# Altium PCB MIXR - Power.PcbDoc (part 2 of 4)
Units mm, origin at the board's own origin, x right, y up, seen from the top; angles counter-clockwise.
Board outline 109.43 x 109.43 mm, 2 copper layers (Top Layer, Bottom Layer), stack 1.569 mm thick; 131 components, 82 nets, 420 pads, 247 vias.
Unrouted connection lines stored in the file: 102.
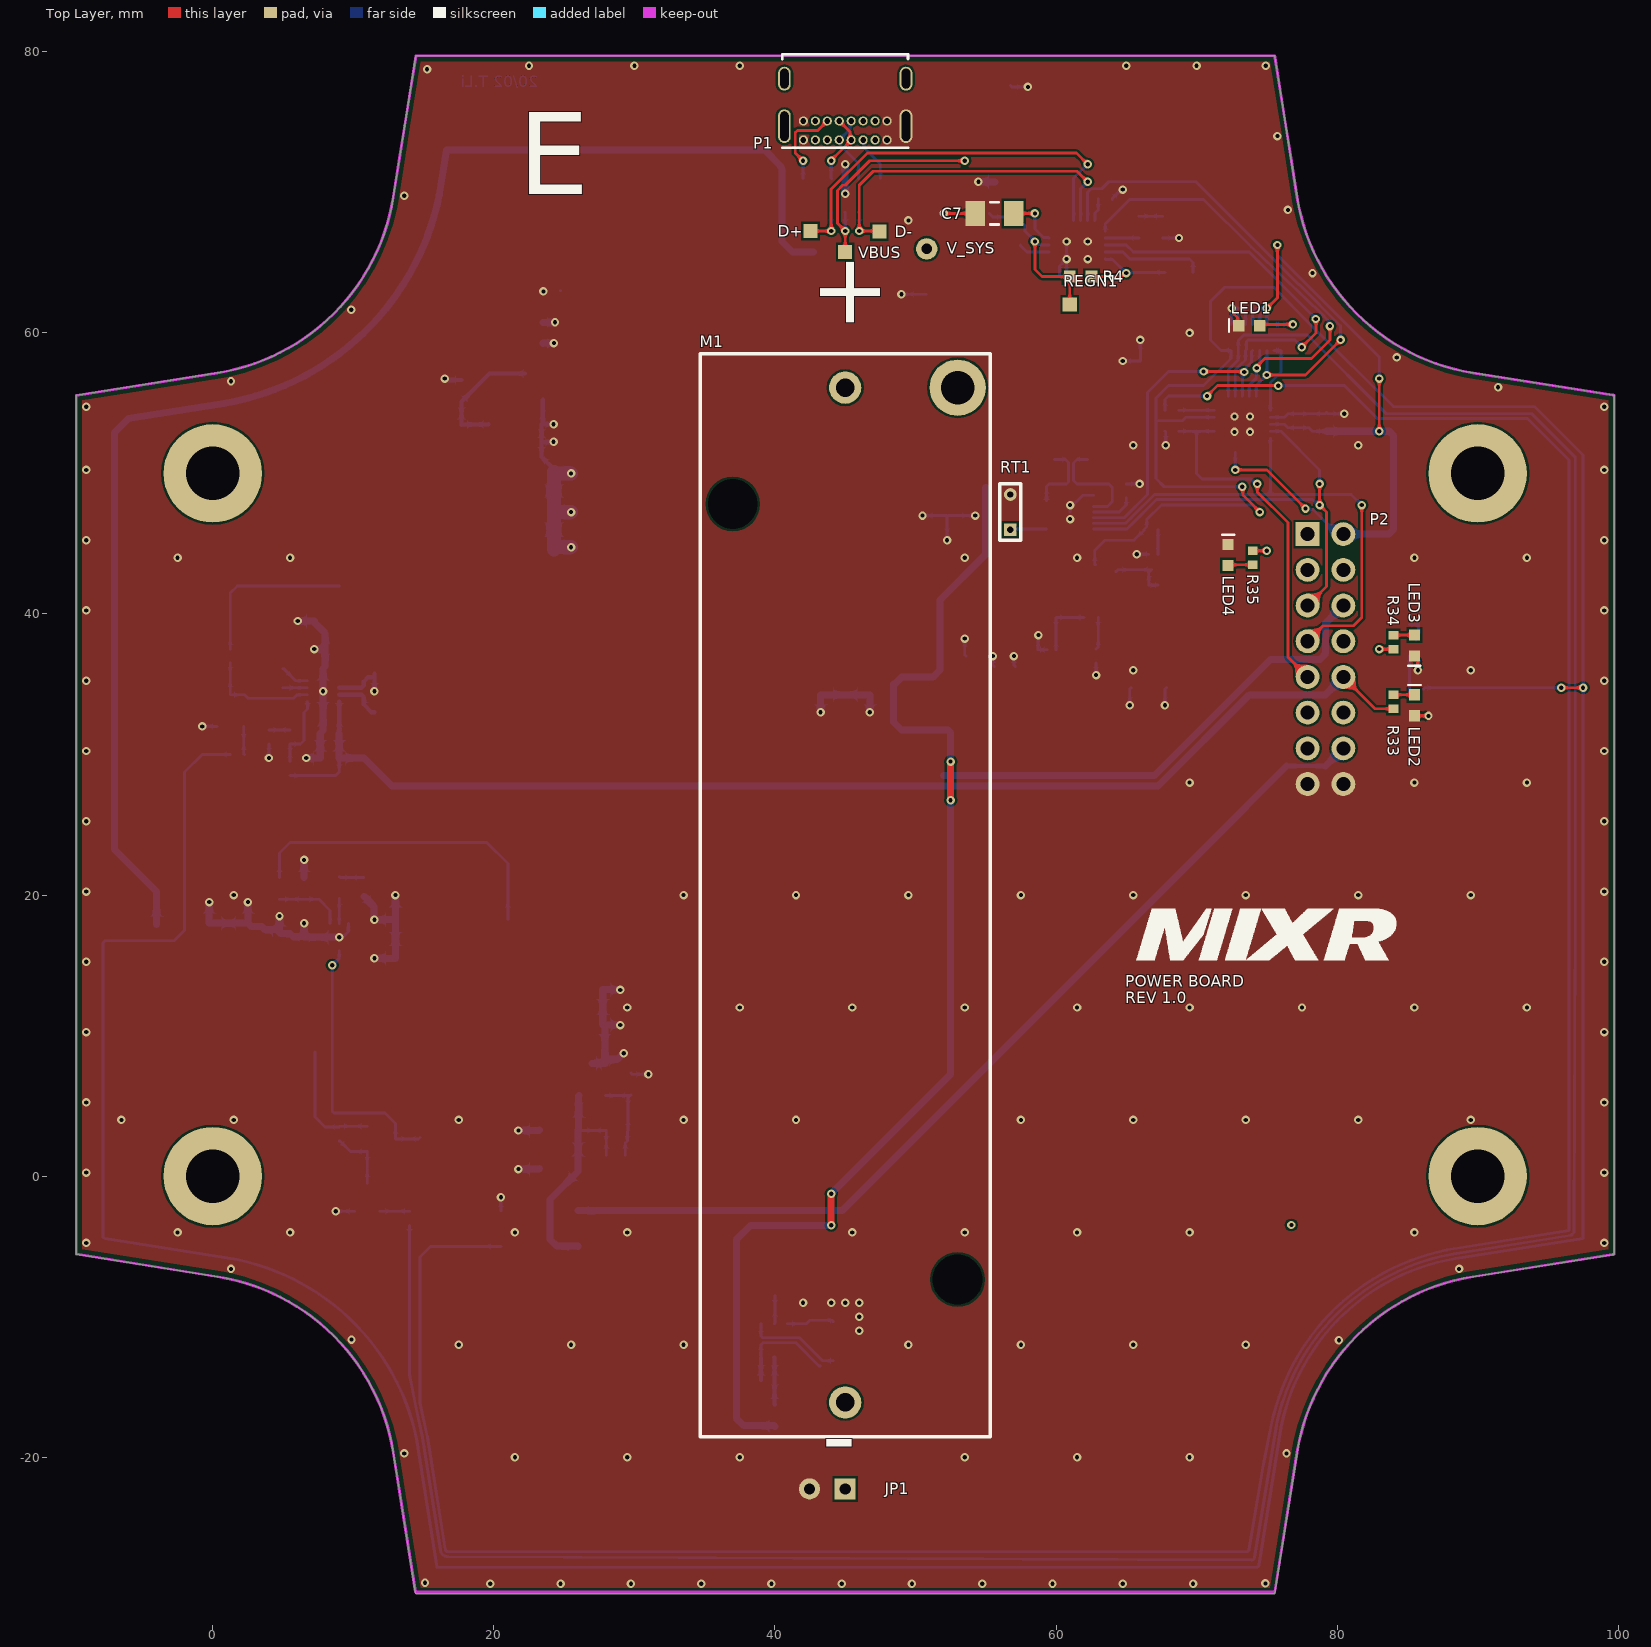
[diagram p0: Top Layer view]

## Part data (continued)
F3: "FUSE 5.0A 125VAC FAST 1206", Case Code (Imperial)=1206, Case Code (Metric)=3216, Current Rating=5A, DC Cold Resistance=19mR, Manufacturer="Bel TRP", Manufacturer Part Number=C1F5, Max Operating Temperature=125°C, Min Operating Temperature=-55°C, Supplier Part Number 1=507-1886-1-ND, Voltage Rating=125V, Voltage Rating (DC)=63V, Approvals=CE,cURus, Case/Package=1206, Category=Fuses, ComponentLink1Description=http://www.mouser.com/ds/2/643/C1F-594910.pdf?src-supplier=Mouser, ComponentLink1URL=http://www.mouser.com/ds/2/643/C1F-594910.pdf?src-supplier=Mouser, ComponentLink2Description=http://belfuse.com/pdfs/C1F.pdf?src-supplier=Avnet, ComponentLink2URL=http://belfuse.com/pdfs/C1F.pdf?src-supplier=Avnet, ComponentLink3Description=https://belfuse.com/resources/datasheets/circuitprotection/ds-cp-c1f-series.pdf?src-supplier=Digi-Key, ComponentLink3URL=https://belfuse.com/resources/datasheets/circuitprotection/ds-cp-c1f-series.pdf?src-supplier=Digi-Key, Contact Plating=Tin, Fuse Type="Board Mount (Cartridge Style Excluded)", Length=0.126inch, Mount="Surface Mount", Number of Pins=2, Packaging="Tape and Reel", Pricing 1="1=0.29000, 5=0.27800, 10=0.26500, 50=0.23660, 100=0.22030, 250=0.19584, 500=0.16320, 1000=0.15504 (USD)", RoHS=Yes, Stock 1=12696, Supplier 1=Digi-Key, Voltage Rating (AC)=125V, Width=0.062inch
JP1: library part "CONN 2POS JUMPER 0.1\"", "2 Positions Header Connector Through Hole Gold", Current Rating=2A, Insulation Color=Black, Manufacturer="Omron Electronics Inc-EMC Div", Manufacturer Part Number=XG8T-0231, Material Flammability Rating="UL94 V-0", Operating Temperature="-55°C ~ 105°C", Supplier Part Number 1=XG8T-0231-ND, Voltage Rating=300V, Applications=-, Category="Connectors, Interconnects", ComponentLink1Description=http://www.omron.com/ecb/products/pdf/en-xj8.pdf, ComponentLink1URL=http://www.omron.com/ecb/products/pdf/en-xj8.pdf, Connector Type=Header, Contact Finish - Mating=Gold, Contact Finish - Post=Tin, Contact Finish Thickness - Mating="5.9µin (0.15µm)", Contact Finish Thickness - Post=-, Contact Length - Mating="0.169\" (4.30mm)", Contact Length - Post="0.118\" (3.00mm)", Contact Material="Brass, Nickel", Contact Shape=Square, Contact Type="Male Pin", Fastening Type=-, Features=-, Ingress Protection=-, Insulation Height="0.098\" (2.50mm)", Insulation Material="Polybutylene Terephthalate (PBT), Glass Filled", Mated Stacking Heights=-, Mounting Type="Through Hole", Number of Positions=2, Number of Positions Loaded=All, Number of Rows=2, Overall Contact Length="0.386\" (9.80mm)", Packaging=Bulk, Part Status=Active, Pitch - Mating=-, Pricing 1="1=0.28, 10=0.265, 100=0.183, 500=0.15484, 1000=0.12668, 5000=0.11261, 10000=0.10205 (CAD)", RoHS="RoHS Compliant", Row Spacing - Mating="0.100\"", Shrouding=Unshrouded, Stock 1=9094, Style="Board to Board or Cable", Supplier 1=Digi-Key, Termination=Solder, Type=JUMPER
L1 L3: "WURTH ELEKTRONIK         74437334010             Surface Mount Power Inductor, WE-LHMI Series, 1 H, 5.3 A, 13.9 A, Shielded, 0.02 ohm", Case/Package=SMD/SMT, Current Rating=5.3A, DC Resistance (DCR)=20mR, Inductance=1uH, Inductance Tolerance=20%, Manufacturer="Wurth Electronics", Manufacturer Part Number=74437334010, Max Operating Temperature=125°C, Min Operating Temperature=-40°C, Saturation Current=13.9A, Self Resonant Frequency=65MHz, Supplier Part Number 1=732-6149-1-ND, Test Frequency=100kHz, Category="Fixed Inductors", ComponentLink1Description=http://www.farnell.com/datasheets/1880894.pdf?src-supplier=Farnell, ComponentLink1URL=http://www.farnell.com/datasheets/1880894.pdf?src-supplier=Farnell, ComponentLink2Description=http://www.farnell.com/datasheets/1880894.pdf?src-supplier=Element14, ComponentLink2URL=http://www.farnell.com/datasheets/1880894.pdf?src-supplier=Element14, Composition=Wirewound, Core Material=Ferrite, Height - Seated (Max)=0.079inch, Length=0.205inch, Mount="Surface Mount", Number of Pins=2, Packaging="Cut Tape", Pricing 1="1=2.39000, 50=2.21400, 100=2.01300, 250=1.83000, 500=1.66300 (USD)", REACH SVHC=Unknown, RMS Current (Irms)=5.3A, RoHS=Yes, Shielding=Shielded, Stock 1=2869, Supplier 1=Digi-Key, Tolerance=20%, Width=0.205inch
L2: "FIXED IND 22UH 1.7A 280MOHM SMD", Inductance=22uH, Manufacturer="Wurth Electronics", Manufacturer Part Number=74438356220, Supplier Part Number 1=732-11664-1-ND, ComponentLink1Description=https://katalog.we-online.de/pbs/datasheet/74438356220.pdf?src-supplier=Digi-Key, ComponentLink1URL=https://katalog.we-online.de/pbs/datasheet/74438356220.pdf?src-supplier=Digi-Key, Pricing 1="1=1.99000, 50=1.89700, 100=1.75600, 250=1.62600, 500=1.50600 (USD)", RoHS=No, Stock 1=1274, Supplier 1=Digi-Key
LED1: "Blue 470nm LED Indication - Discrete 2.8V 0603 (1608 Metric)", Color=Blue, Current - Test=5mA, Lens Color=Colorless, Manufacturer 1="Lite-On Inc.", Manufacturer Part Number 1=LTST-C193TBKT-5A, Millicandela Rating=15mcd, Package / Case="0603 (1608 Metric)", Supplier Device Package="Chip LED", Supplier Part Number 1=160-1827-1-ND, Voltage - Forward (Vf) (Typ)=2.8V, ComponentLink1Description=http://optoelectronics.liteon.com/upload/download/DS22-2004-060/P_100_LTST-C193TBKT-5A.pdf, ComponentLink1URL=http://optoelectronics.liteon.com/upload/download/DS22-2004-060/P_100_LTST-C193TBKT-5A.pdf, Height (Max)=0.45mm, Lens Style/Size="Rectangle with Flat Top, 1.15mm x 0.80mm", Lens Transparency=Clear, Mounting Type="Surface Mount", Packaging="Cut Tape (CT)", Part Status=Active, Size / Dimension="1.60mm L x 0.80mm W", Supplier 1=Digi-Key, Viewing Angle=130°, Wavelength - Dominant=470nm, Wavelength - Peak=468nm
LED2 LED3 LED4: "Green 572nm LED Indication - Discrete 2V 0603 (1608 Metric)", Color=Green, Current - Test=20mA, Lens Color=Colorless, Manufacturer="Wurth Electronics Inc.", Manufacturer Part Number=150060VS75000, Millicandela Rating=40mcd, Package / Case="0603 (1608 Metric)", Supplier Device Package=0603, Supplier Part Number 1=732-4980-1-ND, Voltage - Forward (Vf) (Typ)=2V, Category=Optoelectronics, ComponentLink1Description=http://katalog.we-online.de/led/datasheet/150060VS75000.pdf, ComponentLink1URL=http://katalog.we-online.de/led/datasheet/150060VS75000.pdf, Features=-, Height (Max)=0.80mm, Lens Style/Size="Rectangle with Flat Top, 1.10mm x 0.70mm", Lens Transparency=Clear, Mounting Type="Surface Mount", Packaging="Cut Tape (CT)", Part Status=Active, Pricing 1="1=0.21, 100=0.1617, 500=0.13964 (CAD)", RoHS="RoHS Compliant", Size / Dimension="1.60mm L x 0.80mm W", Stock 1=9408, Supplier 1=Digi-Key, Viewing Angle=140°, Wavelength - Dominant=570nm, Wavelength - Peak=572nm
M1: library part "BATTERY HOLDER 18650", "BATTERY HOLDER 18650 PC PIN", Manufacturer="Keystone Electronics", Manufacturer Part Number=1043P, Max Operating Temperature=145°C, Min Operating Temperature=-50°C, Package Quantity=50, Supplier Part Number 1=36-1043P-ND, Category=Uncategorized, ComponentLink1Description=https://datasheet.ciiva.com/41860/1043p-41860216.pdf?src-supplier=Digi-Key, ComponentLink1URL=https://datasheet.ciiva.com/41860/1043p-41860216.pdf?src-supplier=Digi-Key, Mount="Through Hole,PCB", Number of Cells=1, Packaging=Tray, Pricing 1="1=2.58000, 25=2.16760, 100=1.91000, 250=1.82000, 500=1.67000, 1000=1.52000, 2500=1.30900, 5000=1.19000 (USD)", RoHS=Yes, Stock 1=6353, Supplier 1=Digi-Key, Termination="PC Pin"
P1: "USB - C USB 2.0 Receptacle Connector 16 Position Through Hole, Right Angle", Manufacturer="Global Connector Technology", Manufacturer Part Number=USB4085-GF-A, Supplier Part Number 1=2073-USB4085-GF-ACT-ND, Pricing 1="1 = 1.440000, 10 = 1.307000, 25 = 1.227200, 50 = 1.174000, 100 = 1.120600, 250 = 1.013840 (USD)", RoHS=No, Stock 1=286, Supplier 1=Digi-Key
P2: "Conn Elevated Socket SKT 16 POS 2.54mm Solder ST Thru-Hole Tube", Contact Resistance=10mR, Housing Color=Black, Manufacturer=Samtec, Manufacturer Part Number=ESQ-108-12-T-D, Max Current Rating=6.9A, Max Operating Temperature=105°C, Max Voltage Rating (AC)=550V, Min Operating Temperature=-55°C, Supplier Part Number 1=SAM15568-ND, Category="Headers and Wire Housings", ComponentLink1Description=http://components.arrow.com/part/dataview/2753158S6123219N1004?src-supplier=Arrow, ComponentLink1URL=http://components.arrow.com/part/dataview/2753158S6123219N1004?src-supplier=Arrow, ComponentLink2Description=http://www.farnell.com/datasheets/1992053.pdf?src-supplier=Farnell, ComponentLink2URL=http://www.farnell.com/datasheets/1992053.pdf?src-supplier=Farnell, ComponentLink3Description=http://components.arrow.com/part/dataview/0323_01326666?src-supplier=Arrow+Europe, ComponentLink3URL=http://components.arrow.com/part/dataview/0323_01326666?src-supplier=Arrow+Europe, ComponentLink4Description=https://www.verical.com/server-webapp/html/getDatasheet?partID=176003&src-supplier=Verical, ComponentLink4URL=https://www.verical.com/server-webapp/html/getDatasheet?partID=176003&src-supplier=Verical, ComponentLink5Description=http://www.farnell.com/datasheets/1992053.pdf?src-supplier=Newark, ComponentLink5URL=http://www.farnell.com/datasheets/1992053.pdf?src-supplier=Newark, ComponentLink6Description=http://cloud.samtec.com/catalog_english/ESW_TH.PDF?src-supplier=Avnet, ComponentLink6URL=http://cloud.samtec.com/catalog_english/ESW_TH.PDF?src-supplier=Avnet, ComponentLink7Description=http://suddendocs.samtec.com/prints/esq-1xx-xx-x-x-xxx-xx-x-xx-mkt.pdf?src-supplier=Digi-Key, ComponentLink7URL=http://suddendocs.samtec.com/prints/esq-1xx-xx-x-x-xxx-xx-x-xx-mkt.pdf?src-supplier=Digi-Key, Contact Material=Bronze, Contact Plating=Tin, Depth=4.95mm, Gender=Receptacle, Housing Material=Polyester, Length=20.83mm, Number of Contacts=16, Number of Rows=2, Orientation=Vertical, Packaging=Rail/Tube, Pitch=2.54mm, Pricing 1="1=1.84000, 10=1.66800, 100=1.43010, 500=1.19176, 1000=1.02150, 5000=0.90573, 10000=0.88530 (USD)", Radiation Hardening=No, REACH SVHC="No SVHC", RoHS=Yes, Stock 1=40, Supplier 1=Digi-Key, Termination=Solder
Q1: "P-Channel 30V 3.8A (Ta) 1.08W (Ta) Surface Mount SOT-23", Current - Continuous Drain (Id) @ 25°C="3.8A (Ta)", Drive Voltage (Max Rds On,  Min Rds On)="4.5V, 10V", Manufacturer="Diodes Incorporated", Manufacturer Part Number=DMP3099L-7, Operating Temperature="-55°C ~ 150°C (TJ)", Package / Case="TO-236-3, SC-59, SOT-23-3", Power Dissipation (Max)="1.08W (Ta)", Supplier Device Package=SOT-23, Supplier Part Number 1=DMP3099L-7DICT-ND, Category="Discrete Semiconductor Products", ComponentLink1Description=https://www.diodes.com/assets/Datasheets/DMP3099L.pdf, ComponentLink1URL=https://www.diodes.com/assets/Datasheets/DMP3099L.pdf, FET Feature=-, FET Type=P-Channel, Mounting Type="Surface Mount", Packaging="Cut Tape (CT)", Part Status=Active, Pricing 1="1=0.59, 10=0.429, 100=0.2522, 500=0.14282, 1000=0.10949 (CAD)", Rds On (Max) @ Id, Vgs="65 mOhm @ 3.8A, 10V", RoHS="RoHS Compliant", Stock 1=108364, Supplier 1=Digi-Key, Technology="MOSFET (Metal Oxide)", Vgs (Max)=±20V, Vgs(th) (Max) @ Id="2.1V @ 250µA"
Q2: "N-Channel 30V 6.2A (Ta) 900mW (Ta) Surface Mount SOT-23", Case/Package=TO-236-3, Continuous Drain Current (ID)=6.2A, Drain to Source Voltage (Vdss)=30V, Input Capacitance=873pF, Manufacturer=Diodes, Manufacturer Part Number=DMN3023L-7, Max Operating Temperature=150°C, Max Power Dissipation=900mW, Min Operating Temperature=-55°C, Supplier Part Number 1=DMN3023L-7DICT-ND, ComponentLink1Description=https://www.diodes.com/assets/Datasheets/DMN3023L.pdf, ComponentLink1URL=https://www.diodes.com/assets/Datasheets/DMN3023L.pdf, ComponentLink2Description=http://www.mouser.com/ds/2/115/DMN3023L-959533.pdf, ComponentLink2URL=http://www.mouser.com/ds/2/115/DMN3023L-959533.pdf, Mount="Surface Mount", Packaging="Tape and Reel", Pricing 1="1=0.47, 10=0.368, 100=0.2529, 500=0.1734, 1000=0.1301 (USD)", Rds On Max=25mR, Stock 1=38246, Supplier 1=Digi-Key
Q3 Q4: "MOSFET 12V 29mOhm@4.5V 4.5A N-CH", Continuous Drain Current (ID)=4.5A, Drain to Source Breakdown Voltage=12V, Drain to Source Resistance=41mR, Gate to Source Voltage (Vgs)=8V, Input Capacitance=500pF, Manufacturer="Vishay Semiconductors", Manufacturer Part Number=SIA527DJ-T1-GE3, Max Operating Temperature=150°C, Max Power Dissipation=7.8W, Min Operating Temperature=-55°C, Package Quantity=3000, Resistance=0.00071R, Supplier Part Number 1=SIA527DJ-T1-GE3CT-ND, Category=MOSFETs, ComponentLink1Description=https://datasheet.ciiva.com/24094/sia527dj-267652-24094820.pdf?src-supplier=Mouser, ComponentLink1URL=https://datasheet.ciiva.com/24094/sia527dj-267652-24094820.pdf?src-supplier=Mouser, ComponentLink2Description=https://datasheet.ciiva.com/29589/sia527dj-29589668.pdf?src-supplier=Digi-Key, ComponentLink2URL=https://datasheet.ciiva.com/29589/sia527dj-29589668.pdf?src-supplier=Digi-Key, ComponentLink3Description=https://datasheet.ciiva.com/29589/sia527dj-29589669.pdf?src-supplier=Digi-Key, ComponentLink3URL=https://datasheet.ciiva.com/29589/sia527dj-29589669.pdf?src-supplier=Digi-Key, ComponentLink4Description=https://datasheet.ciiva.com/29589/sia527dj-29589670.pdf?src-supplier=Digi-Key, ComponentLink4URL=https://datasheet.ciiva.com/29589/sia527dj-29589670.pdf?src-supplier=Digi-Key, Drain to Source Voltage (Vdss)=12V, Element Configuration=Dual, Fall Time=10ns, FET Type="N and P-Channel", Mount="Surface Mount", Number of Channels=2, Packaging="Tape and Reel", Pricing 1="1=0.54000, 10=0.46400, 100=0.32140, 500=0.25090, 1000=0.20394 (USD)", Rds On Max=29mR, Rise Time=10ns, RoHS=Yes, Stock 1=14908, Supplier 1=Digi-Key, Turn-Off Delay Time=22ns, Turn-On Delay Time=10ns
Q5: "N-Channel 60V 310mA (Ta) 370mW (Ta) Surface Mount SOT-23", Case/Package=TO-236-3, Continuous Drain Current (ID)=1.6A, Drain to Source Breakdown Voltage=60V, Drain to Source Resistance=140mR, Gate to Source Voltage (Vgs)=20V, Input Capacitance=315pF, Manufacturer=Diodes, Manufacturer Part Number=DMN6140L-7, Max Operating Temperature=150°C, Max Power Dissipation=700mW, Min Operating Temperature=-55°C, Package Quantity=3000, Power Dissipation=540mW, Supplier Part Number 1=DMN65D8L-7DICT-ND, Threshold Voltage=3V, ComponentLink1Description=https://datasheet.ciiva.com/29747/dmn6140l-29747654.pdf, ComponentLink1URL=https://datasheet.ciiva.com/29747/dmn6140l-29747654.pdf, ComponentLink2Description=https://datasheet.ciiva.com/29747/dmn6140l-29747660.pdf, ComponentLink2URL=https://datasheet.ciiva.com/29747/dmn6140l-29747660.pdf, ComponentLink3Description=https://datasheet.ciiva.com/6371/dmn65d8l-6371124.pdf, ComponentLink3URL=https://datasheet.ciiva.com/6371/dmn65d8l-6371124.pdf, ComponentLink4Description=https://datasheet.ciiva.com/6371/dmn65d8l-6371126.pdf, ComponentLink4URL=https://datasheet.ciiva.com/6371/dmn65d8l-6371126.pdf, ComponentLink5Description=https://datasheet.ciiva.com/13058/dmn65d8l-219098-13058455.pdf, ComponentLink5URL=https://datasheet.ciiva.com/13058/dmn65d8l-219098-13058455.pdf, ComponentLink6Description=https://datasheet.ciiva.com/6371/dmn65d8l-6371128.pdf, ComponentLink6URL=https://datasheet.ciiva.com/6371/dmn65d8l-6371128.pdf, Drain to Source Voltage (Vdss)=60V, Element Configuration=Single, Fall Time=2.7ns, FET Type="1 N-Channel", Height=1.1mm, Lead Free="Lead Free", Length=3mm, Mount="Surface Mount", Number of Channels=1, Number of Elements=1, Number of Pins=3, Packaging="Tape and Reel", Rds On Max=140mR, REACH SVHC="No SVHC", Rise Time=3.6ns, Stock 1=0, Supplier 1=Digi-Key, Turn-Off Delay Time=16.3ns, Turn-On Delay Time=2.6ns, Weight=0.000282oz, Width=1.4mm
Q6: Case/Package=DFN, Continuous Drain Current (ID)=9.3A, Drain to Source Resistance=28mR, Drain to Source Voltage (Vdss)=20V, Gate to Source Voltage (Vgs)=12V, Input Capacitance=1.55nF, Manufacturer=Diodes, Manufacturer Part Number=DMN2014LHAB-7, Max Operating Temperature=150°C, Max Power Dissipation=800mW, Min Operating Temperature=-55°C, Package Quantity=3000, Supplier Part Number 1=DMN2014LHAB-7DICT-ND, Category=MOSFETs, ComponentLink1Description=https://datasheet.ciiva.com/29590/dmn2014lhab-29590005.pdf?src-supplier=Digi-Key, ComponentLink1URL=https://datasheet.ciiva.com/29590/dmn2014lhab-29590005.pdf?src-supplier=Digi-Key, ComponentLink2Description=https://datasheet.ciiva.com/29590/dmn2014lhab-29590007.pdf?src-supplier=Digi-Key, ComponentLink2URL=https://datasheet.ciiva.com/29590/dmn2014lhab-29590007.pdf?src-supplier=Digi-Key, ComponentLink3Description=https://datasheet.ciiva.com/29590/dmn2014lhab-29590006.pdf?src-supplier=Digi-Key, ComponentLink3URL=https://datasheet.ciiva.com/29590/dmn2014lhab-29590006.pdf?src-supplier=Digi-Key, Fall Time=12ns, FET Type="2 N-Channel", Height=0.6mm, Length=3.05mm, Mount="Surface Mount", Number of Pins=7, Packaging="Tape and Reel", Pricing 1="1=0.51000, 10=0.43800, 100=0.30340, 500=0.23688, 1000=0.19254 (USD)", Rds On Max=13mR, Rise Time=15.5ns, RoHS=Yes, Stock 1=3087, Supplier 1=Digi-Key, Turn-Off Delay Time=40.9ns, Turn-On Delay Time=6.9ns, Width=2.05mm
R1 R2: "5.1 kOhms ±1% 0.063W, 1/16W Chip Resistor 0402 (1005 Metric) Automotive AEC-Q200 Thick Film", Case Code (Imperial)=0402, Case Code (Metric)=1005, Manufacturer="Stackpole Electronics", Manufacturer Part Number=RMCF0402FT5K10, Max Operating Temperature=155°C, Max Power Dissipation=63mW, Min Operating Temperature=-55°C, Power Rating=62.5mW, Resistance=5K1, Supplier Part Number 1=RMCF0402FT5K10CT-ND, Temperature Coefficient=100ppm/°C, Tolerance=1%, Case/Package=0402, Category="Chip SMD Resistors", ComponentLink1Description=https://www.seielect.com/catalog/SEI-RMCF_RMCP.pdf?src-supplier=Avnet, ComponentLink1URL=https://www.seielect.com/catalog/SEI-RMCF_RMCP.pdf?src-supplier=Avnet, ComponentLink2Description=https://www.seielect.com/catalog/SEI-Packaging.pdf?src-supplier=Digi-Key, ComponentLink2URL=https://www.seielect.com/catalog/SEI-Packaging.pdf?src-supplier=Digi-Key, ComponentLink3Description=http://components.arrow.com/part/dataview/51396875S385758N1174?src-supplier=Arrow, ComponentLink3URL=http://components.arrow.com/part/dataview/51396875S385758N1174?src-supplier=Arrow, ComponentLink4Description=https://www.seielect.com/catalog/SEI-RMCF_RMCP.pdf?src-supplier=Avnet+Asia, ComponentLink4URL=https://www.seielect.com/catalog/SEI-RMCF_RMCP.pdf?src-supplier=Avnet+Asia, Composition="Thick Film", Contact Plating=Tin,Matte, Features="Automotive AEC-Q200", Height=0.016inch, Length=0.039inch, Mount="Surface Mount", Number of Terminations=2, Packaging="Tape and Reel", Pricing 1="1=0.10000, 10=0.01400, 100=0.00580, 1000=0.00262, 2500=0.00228, 5000=0.00188 (USD)", Radiation Hardening=No, RoHS=Yes, Stock 1=76800, Supplier 1=Digi-Key, Width=0.02inch
R3 R19 R23 R29 R30 R37 R40: "Surface Mount Thick Film Resistor, Rc Series, 10 Kohm, 62.5 Mw, - 1%, 50 V, 0402 [1005 Metric]", Case Code (Imperial)=0402, Case Code (Metric)=1005, Manufacturer=Yageo, Manufacturer Part Number=RC0402FR-0710KL, Max Operating Temperature=155°C, Min Operating Temperature=-55°C, Power Rating=62.5mW, Resistance=10K0, Supplier Part Number 1=311-10.0KLRCT-ND, Temperature Coefficient=100ppm/°C, Tolerance=1%, Voltage Rating=50V, Case/Package=0402, Category="Chip SMD Resistors", ComponentLink1Description=https://datasheet.ciiva.com/7660/38568-7660787.pdf?src-supplier=Element14, ComponentLink1URL=https://datasheet.ciiva.com/7660/38568-7660787.pdf?src-supplier=Element14, ComponentLink2Description=https://datasheet.ciiva.com/7983/1018594-7983486.pdf?src-supplier=Element14, ComponentLink2URL=https://datasheet.ciiva.com/7983/1018594-7983486.pdf?src-supplier=Element14, ComponentLink3Description=https://datasheet.ciiva.com/7849/1784430-7849813.pdf?src-supplier=Element14, ComponentLink3URL=https://datasheet.ciiva.com/7849/1784430-7849813.pdf?src-supplier=Element14, ComponentLink4Description=https://datasheet.ciiva.com/7849/1686128-7849814.pdf?src-supplier=Element14, ComponentLink4URL=https://datasheet.ciiva.com/7849/1686128-7849814.pdf?src-supplier=Element14, ComponentLink5Description=https://datasheet.ciiva.com/7849/1784430-7849815.pdf?src-supplier=Element14, ComponentLink5URL=https://datasheet.ciiva.com/7849/1784430-7849815.pdf?src-supplier=Element14, ComponentLink6Description=https://datasheet.ciiva.com/22747/1018594-22747512.pdf?src-supplier=Element14, ComponentLink6URL=https://datasheet.ciiva.com/22747/1018594-22747512.pdf?src-supplier=Element14, ComponentLink7Description=https://datasheet.ciiva.com/12667/pyu-rc0402-51-rohs-l-6-r-12667067.pdf?src-supplier=Mouser, ComponentLink7URL=https://datasheet.ciiva.com/12667/pyu-rc0402-51-rohs-l-6-r-12667067.pdf?src-supplier=Mouser, Composition="Thick Film", Depth=0.5mm, Height=0.32mm, Lead Free="Lead Free", Lead Pitch=0.2mm, Length=1mm, Military Standard=Not, Number of Pins=2, Number of Terminations=2, Packaging="Tape and Reel", Pricing 1="1=0.10000, 10=0.01600, 100=0.00640, 1000=0.00289, 2500=0.00251, 5000=0.00207 (USD)", REACH SVHC="No SVHC", RoHS=Yes, Stock 1=60761136, Supplier 1=Digi-Key, Termination=SMD/SMT, Voltage Rating (DC)=50V, Width=0.5mm, Working Voltage=50V
R4 R5 R11 R12: "RES SMD 10K OHM 1% 1/10W 0603", Manufacturer 1=Yageo, Manufacturer Part Number 1=RC0603FR-0710KL, Operating Temperature="-55°C ~ 155°C", Package / Case="0603 (1608 Metric)", Power=1/10W, Resistance=10k, Supplier Device Package=0603, Supplier Part Number 1=311-10.0KHRCT-ND, Temperature Coefficient=±100ppm/°C, Tolerance=±1%, ComponentLink1Description=http://www.yageo.com/documents/recent/PYu-RC_Group_51_RoHS_L_7.pdf, ComponentLink1URL=http://www.yageo.com/documents/recent/PYu-RC_Group_51_RoHS_L_7.pdf, Composition="Thick Film", Failure Rate=-, Height - Seated (Max)="0.022\" (0.55mm)", Packaging="Cut Tape (CT)", Part Status=Active, Size / Dimension="0.063\" L x 0.031\" W (1.60mm x 0.80mm)", Supplier 1=Digi-Key
R6: "220 Ohms ±1% 0.1W, 1/10W Chip Resistor 0603 (1608 Metric) Moisture Resistant Thick Film", Manufacturer=Yageo, Manufacturer Part Number=RC0603FR-07220RL, Operating Temperature="-55°C ~ 155°C", Package / Case="0603 (1608 Metric)", Power (Watts)=1/10W, Resistance=220, Supplier Device Package=0603, Supplier Part Number 1=311-220HRCT-ND, Temperature Coefficient=±100ppm/°C, Tolerance=±1%, Category=Resistors, ComponentLink1Description=http://www.yageo.com/documents/recent/PYu-RC_Group_51_RoHS_L_8.pdf, ComponentLink1URL=http://www.yageo.com/documents/recent/PYu-RC_Group_51_RoHS_L_8.pdf, Composition="Thick Film", Failure Rate=-, Features="Moisture Resistant", Height - Seated (Max)="0.022\" (0.55mm)", Packaging="Cut Tape (CT)", Part Status=Active, Pricing 1="1=0.15, 10=0.022, 100=0.0088, 1000=0.00392, 2500=0.0034 (CAD)", RoHS="RoHS Compliant", Size / Dimension="0.063\" L x 0.032\" W (1.60mm x 0.80mm)", Stock 1=1318812, Supplier 1=Digi-Key
R7: "330 Ohms ±1% 0.1W, 1/10W Chip Resistor 0603 (1608 Metric) Automotive AEC-Q200, Moisture Resistant Thick Film", Manufacturer="TE Connectivity", Manufacturer Part Number=CRGCQ0603F330R, Supplier Part Number 1=A129682CT-ND, ComponentLink1Description=http://www.te.com/commerce/DocumentDelivery/DDEController?Action=srchrtrv&DocNm=1773204-3&DocType=DS&DocLang=English&src-supplier=Digi-Key, ComponentLink1URL=http://www.te.com/commerce/DocumentDelivery/DDEController?Action=srchrtrv&DocNm=1773204-3&DocType=DS&DocLang=English&src-supplier=Digi-Key, ComponentLink2Description=https://www.te.com/commerce/DocumentDelivery/DDEController?Action=srchrtrv&DocNm=1773204-3&DocType=DS&DocLang=English&src-supplier=Digi-Key, ComponentLink2URL=https://www.te.com/commerce/DocumentDelivery/DDEController?Action=srchrtrv&DocNm=1773204-3&DocType=DS&DocLang=English&src-supplier=Digi-Key, Pricing 1="1 = 0.10000, 10 = 0.03300, 100 = 0.01320, 1000 = 0.00595, 2500 = 0.00516 (USD)", RoHS=No, Stock 1=87700, Supplier 1=Digi-Key
R8: "RES SMD 40.2 OHM 0.5% 1/10W 0603", Manufacturer 1=Yageo, Manufacturer Part Number 1=RT0603DRE0740R2L, Operating Temperature="-55°C ~ 155°C", Package / Case="0603 (1608 Metric)", Power=1/10W, Resistance=40.2, Supplier Device Package=0603, Supplier Part Number 1=311-2576-1-ND, Temperature Coefficient=±50ppm/°C, Tolerance=±0.5%, ComponentLink1Description=http://www.yageo.com/documents/recent/PYu-RT_1-to-0.01_RoHS_L_7.pdf, ComponentLink1URL=http://www.yageo.com/documents/recent/PYu-RT_1-to-0.01_RoHS_L_7.pdf, Composition="Thin Film", Failure Rate=-, Height - Seated (Max)="0.022\" (0.55mm)", Packaging="Cut Tape (CT)", Part Status=Active, Size / Dimension="0.063\" L x 0.031\" W (1.60mm x 0.80mm)", Supplier 1=Digi-Key
R9: "390 kOhms ±0.5% 0.1W, 1/10W Chip Resistor 0603 (1608 Metric) Thin Film", Case Code (Imperial)=0603, Case Code (Metric)=1608, Manufacturer=Yageo, Manufacturer Part Number=RT0603DRE07390KL, Max Operating Temperature=155°C, Max Power Dissipation=100mW, Min Operating Temperature=-55°C, Resistance=390k, Supplier Part Number 1=311-2555-1-ND, Temperature Coefficient=50ppm/°C, Tolerance=0.5%, Case/Package=0603, ComponentLink1Description=http://www.yageo.com/documents/recent/PYu-RT_1-to-0.01_RoHS_L_9.pdf?src-supplier=Digi-Key, ComponentLink1URL=http://www.yageo.com/documents/recent/PYu-RT_1-to-0.01_RoHS_L_9.pdf?src-supplier=Digi-Key, Composition="Thin Film", Features="Moisture Resistant", Height=0.022inch, Length=0.063inch, Number of Terminations=2, Packaging="Tape and Reel", Pricing 1="1 = 0.13000, 10 = 0.11900, 100 = 0.04580, 1000 = 0.02014, 2500 = 0.01740 (USD)", RoHS=Yes, Stock 1=4470, Supplier 1=Digi-Key, Width=0.031inch
R10 R14 R31 R38: "RES SMD 162K OHM 1% 1/16W 0402", Case Code (Imperial)=0402, Case Code (Metric)=1005, Manufacturer=Yageo, Manufacturer Part Number=RC0402FR-07162KL, Max Operating Temperature=155°C, Max Power Dissipation=63mW, Min Operating Temperature=-55°C, Package Quantity=10000, Power Rating=62.5mW, Resistance=162K, Supplier Part Number 1=YAG2370CT-ND, Temperature Coefficient=100ppm/°C, Tolerance=1%, Voltage Rating=50V, Case/Package=0402, Category="Chip SMD Resistors", ComponentLink1Description=https://datasheet.ciiva.com/2452/pyu-r-int-thick-7-2452605.pdf?src-supplier=Digi-Key, ComponentLink1URL=https://datasheet.ciiva.com/2452/pyu-r-int-thick-7-2452605.pdf?src-supplier=Digi-Key, ComponentLink2Description=https://datasheet.ciiva.com/16869/pyu-rc0402-51-rohs-l-6-16869191.pdf?src-supplier=Avnet+Europe, ComponentLink2URL=https://datasheet.ciiva.com/16869/pyu-rc0402-51-rohs-l-6-16869191.pdf?src-supplier=Avnet+Europe, Composition="Thick Film", Contact Plating=Tin,Matte, Depth=0.5mm, Features="Moisture Resistant", Height=0.016inch, Lead Free="Lead Free", Length=1mm, Military Standard=Not, Number of Terminations=2, Packaging="Tape and Reel", Pricing 1="1=0.10000, 10=0.01600, 100=0.00640, 1000=0.00289, 2500=0.00251, 5000=0.00207 (USD)", RoHS=Yes, Stock 1=987661, Supplier 1=Digi-Key, Termination=SMD/SMT, Voltage Rating (DC)=50V, Width=0.02inch
R13 R26 R32 R39: "RES SMD 22.1 OHM 1% 1/16W 0402", Case Code (Imperial)=0402, Case Code (Metric)=1005, Manufacturer=Yageo, Manufacturer Part Number=RC0402FR-0722R1L, Max Operating Temperature=155°C, Max Power Dissipation=63mW, Min Operating Temperature=-55°C, Package Quantity=1, Power Rating=62.5mW, Resistance=22R1, Supplier Part Number 1=311-22.1LRCT-ND, Temperature Coefficient=100ppm/°C, Tolerance=1%, Voltage Rating=50V, Case/Package=0402, Category="Chip SMD Resistors", ComponentLink1Description=https://datasheet.ciiva.com/11808/0900766b80c66297-11808453.pdf?src-supplier=RSComponents, ComponentLink1URL=https://datasheet.ciiva.com/11808/0900766b80c66297-11808453.pdf?src-supplier=RSComponents, ComponentLink2Description=https://datasheet.ciiva.com/16740/pyu-rc0402-51-rohs-l-6-r-16740855.pdf?src-supplier=Future+Electronics, ComponentLink2URL=https://datasheet.ciiva.com/16740/pyu-rc0402-51-rohs-l-6-r-16740855.pdf?src-supplier=Future+Electronics, ComponentLink3Description=https://datasheet.ciiva.com/2518/pyu-r-int-thick-7-2518970.pdf?src-supplier=Digi-Key, ComponentLink3URL=https://datasheet.ciiva.com/2518/pyu-r-int-thick-7-2518970.pdf?src-supplier=Digi-Key, ComponentLink4Description=https://datasheet.ciiva.com/2518/pyu-r-int-thick-7-2518971.pdf?src-supplier=Digi-Key, ComponentLink4URL=https://datasheet.ciiva.com/2518/pyu-r-int-thick-7-2518971.pdf?src-supplier=Digi-Key, ComponentLink5Description=https://datasheet.ciiva.com/2518/pyu-r-int-thick-7-2518972.pdf?src-supplier=Digi-Key, ComponentLink5URL=https://datasheet.ciiva.com/2518/pyu-r-int-thick-7-2518972.pdf?src-supplier=Digi-Key, Composition="Thick Film", Depth=0.5mm, Features="Moisture Resistant", Height=0.016inch, Lead Free="Lead Free", Length=1mm, Military Standard=Not, Number of Terminations=2, Packaging="Tape and Reel", Pricing 1="1=0.10000, 10=0.01600, 100=0.00640, 1000=0.00289, 2500=0.00251, 5000=0.00207 (USD)", REACH SVHC="No SVHC", RoHS=Yes, Stock 1=5073010, Supplier 1=Digi-Key, Termination=SMD/SMT, Voltage Rating (DC)=50V, Width=0.02inch, Working Voltage=50V
R15: "RES SMD 1M OHM 0.1% 1/10W 0603", Case/Package=0603, Manufacturer=Yageo, Manufacturer Part Number=RT0603BRD071ML, Max Operating Temperature=155°C, Max Power Dissipation=100mW, Min Operating Temperature=-55°C, Resistance=1M, Supplier Part Number 1=YAG4498CT-ND, Temperature Coefficient=25ppm/°C, Tolerance=0.1%, Category="Chip SMD Resistors", ComponentLink1Description=http://www.yageo.com/documents/recent/PYu-RT_1-to-0.01_RoHS_L_9.pdf?src-supplier=Digi-Key, ComponentLink1URL=http://www.yageo.com/documents/recent/PYu-RT_1-to-0.01_RoHS_L_9.pdf?src-supplier=Digi-Key, Composition="Thin Film", Features="Moisture Resistant", Height=0.022inch, Length=0.063inch, Number of Terminations=2, Packaging="Tape and Reel", Pricing 1="1=0.35000, 10=0.29600, 100=0.11550, 1000=0.04837, 2500=0.04434 (USD)", RoHS=Yes, Stock 1=26042, Supplier 1=Digi-Key, Width=0.031inch
R16: "RES SMD 26.7K OHM 0.1% 1/5W 0603", Case Code (Imperial)=0603, Case Code (Metric)=1608, Manufacturer=Panasonic, Manufacturer Part Number=ERJ-PB3B2672V, Max Operating Temperature=155°C, Max Power Dissipation=200mW, Min Operating Temperature=-55°C, Resistance=26K7, Supplier Part Number 1=P20132CT-ND, Temperature Coefficient=50ppm/°C, Tolerance=0.1%, Case/Package=0603, Category="Chip SMD Resistors", ComponentLink1Description=https://industrial.panasonic.com/sa/system/files/data/download/catalog/id_fixed-resistors_e_2.pdf?src-supplier=Digi-Key, ComponentLink1URL=https://industrial.panasonic.com/sa/system/files/data/download/catalog/id_fixed-resistors_e_2.pdf?src-supplier=Digi-Key, Composition="Thick Film", Features="Automotive AEC-Q200", Height - Seated (Max)=0.022inch, Length=0.063inch, Number of Terminations=2, Packaging="Tape and Reel", Pricing 1="1=0.25000, 10=0.21100, 25=0.15320, 50=0.11100, 100=0.08230, 250=0.06316, 500=0.04976, 1000=0.03445 (USD)", RoHS=Yes, Stock 1=4400, Supplier 1=Digi-Key, Width=0.032inch
R17: "RES SMD 1K OHM 0.1% 1/16W 0402", Case Code (Imperial)=0402, Case Code (Metric)=1005, Manufacturer=Yageo, Manufacturer Part Number=RT0402BRE071KL, Max Operating Temperature=125°C, Max Power Dissipation=63mW, Min Operating Temperature=-55°C, Package Quantity=10000, Power Rating=62.5mW, Resistance=1K, Supplier Part Number 1=YAG2306CT-ND, Temperature Coefficient=50ppm/°C, Tolerance=0.1%, Voltage Rating=50V, Case/Package=0402, Category="Chip SMD Resistors", ComponentLink1Description=https://datasheet.ciiva.com/2582/pyu-rt-1-to-0-05-rohs-l-5-2582672.pdf?src-supplier=Digi-Key, ComponentLink1URL=https://datasheet.ciiva.com/2582/pyu-rt-1-to-0-05-rohs-l-5-2582672.pdf?src-supplier=Digi-Key, ComponentLink2Description=https://datasheet.ciiva.com/12796/pyu-rt-1-to-0-05-rohs-l-4-12796476.pdf?src-supplier=Mouser, ComponentLink2URL=https://datasheet.ciiva.com/12796/pyu-rt-1-to-0-05-rohs-l-4-12796476.pdf?src-supplier=Mouser, Composition="Thin Film", Depth=0.5mm, Features="Moisture Resistant", Height=0.014inch, Lead Free="Lead Free", Length=1mm, Military Standard=Not, Number of Terminations=2, Packaging="Tape and Reel", Pricing 1="1=0.41000, 10=0.29200, 100=0.11690, 1000=0.05758, 2500=0.05335, 5000=0.04827 (USD)", RoHS=Yes, Stock 1=46127, Supplier 1=Digi-Key, Termination=SMD/SMT, Voltage Rating (DC)=50V, Weight=2.3E-05oz, Width=0.02inch
R18: library part "RES ARRAY 10K OHM 5% 8RES EXB-2HV103JV", "RES ARRAY SMD 10K 5% 62.5mW 1506", Manufacturer="Panasonic Electronic Components", Manufacturer Part Number=EXB-2HV103JV, Operating Temperature="-55°C ~ 125°C", Package / Case="1506, Convex, Long Side Terminals", Power Per Element=62.5mW, Resistance (Ohms)=10k, Supplier Device Package=1506, Supplier Part Number 1=Y1103CT-ND, Temperature Coefficient=±200ppm/°C, Tolerance=±5%, Applications="Automotive AEC-Q200", C="Copyright (C) 2015 Accelerated Designs. All rights reserved", Category=Resistors, Circuit Type=Isolated, ComponentLink1Description=https://industrial.panasonic.com/cdbs/www-data/pdf/AOC0000/AOC0000C14.pdf, ComponentLink1URL=https://industrial.panasonic.com/cdbs/www-data/pdf/AOC0000/AOC0000C14.pdf, Copyright="Copyright (C) 2015 Accelerated Designs. All rights reserved", Height - Seated (Max)="0.022\" (0.55mm)", Manufacturer_Part_Number=EXB-2HV103JV, Mounting Type="Surface Mount", Packaging="Cut Tape (CT)", Part Status=Active, Pricing 1="1=0.43, 10=0.373, 25=0.2712, 50=0.1964, 100=0.1456, 250=0.11176, 500=0.08806, 1000=0.06096 (CAD)", RoHS="RoHS Compliant", Size / Dimension="0.150\" L x 0.063\" W (3.80mm x 1.60mm)", Stock 1=152779, Supplier 1=Digi-Key, Vendor=Panasonic
R20 R21 R27: "5 mOhms ±1% 0.5W, 1/2W Chip Resistor 0805 (2012 Metric) Automotive AEC-Q200, Current Sense, Moisture Resistant Metal Element", Case Code (Imperial)=0805, Case Code (Metric)=2012, Manufacturer=Bourns, Manufacturer Part Number=CRF0805-FZ-R005ELF, Max Operating Temperature=170°C, Max Power Dissipation=500mW, Min Operating Temperature=-55°C, Package Quantity=5000, Resistance=0R005, Supplier Part Number 1=CRF0805-FZ-R005ELFCT-ND, Temperature Coefficient=75ppm/°C, Tolerance=1%, Case/Package=0805, Category="Chip SMD Resistors", ComponentLink1Description=http://www.farnell.com/datasheets/2194442.pdf?src-supplier=Farnell, ComponentLink1URL=http://www.farnell.com/datasheets/2194442.pdf?src-supplier=Farnell, ComponentLink2Description=http://www.mouser.com/ds/2/54/rf-937137.pdf?src-supplier=Mouser, ComponentLink2URL=http://www.mouser.com/ds/2/54/rf-937137.pdf?src-supplier=Mouser, ComponentLink3Description=http://www.farnell.com/datasheets/2194442.pdf?src-supplier=Newark, ComponentLink3URL=http://www.farnell.com/datasheets/2194442.pdf?src-supplier=Newark, ComponentLink4Description=https://www.bourns.com/docs/Product-Datasheets/CRF.pdf?src-supplier=Digi-Key, ComponentLink4URL=https://www.bourns.com/docs/Product-Datasheets/CRF.pdf?src-supplier=Digi-Key, Composition="Metal Film", Features="Moisture Resistant,Automotive AEC-Q200", Height=0.6mm, Height - Seated (Max)=0.031inch, Length=0.079inch, Number of Terminations=2, Packaging="Tape and Reel", Power Rating=500mW, Pricing 1="1=0.54000, 10=0.41700, 100=0.17550, 1000=0.09680, 2500=0.09075 (USD)", RoHS=Yes, Stock 1=12417, Supplier 1=Digi-Key, Termination=SMD/SMT, Weight=0.000194oz, Width=0.049inch
R22: "750 kOhms ±1% 0.063W, 1/16W Chip Resistor 0402 (1005 Metric) Moisture Resistant Thick Film", Case Code (Imperial)=0402, Case Code (Metric)=1005, Manufacturer=Yageo, Manufacturer Part Number=RC0402FR-07750KL, Max Operating Temperature=155°C, Max Power Dissipation=63mW, Min Operating Temperature=-55°C, Resistance=750K, Supplier Part Number 1=YAG3228CT-ND, Temperature Coefficient=100ppm/°C, Tolerance=1%, Voltage Rating=50V, Case/Package=0402, Category="Chip SMD Resistors", ComponentLink1Description=https://datasheet.ciiva.com/7850/1018594-7850087.pdf?src-supplier=Element14, ComponentLink1URL=https://datasheet.ciiva.com/7850/1018594-7850087.pdf?src-supplier=Element14, ComponentLink2Description=https://datasheet.ciiva.com/28388/pyu-rc0402-51-rohs-l-6-28388151.pdf?src-supplier=Avnet+Europe, ComponentLink2URL=https://datasheet.ciiva.com/28388/pyu-rc0402-51-rohs-l-6-28388151.pdf?src-supplier=Avnet+Europe, ComponentLink3Description=https://datasheet.ciiva.com/7850/1018594-7850088.pdf?src-supplier=Element14, ComponentLink3URL=https://datasheet.ciiva.com/7850/1018594-7850088.pdf?src-supplier=Element14, ComponentLink4Description=https://datasheet.ciiva.com/16858/pyu-rc0402-51-rohs-l-6-16858393.pdf?src-supplier=Avnet+Europe, ComponentLink4URL=https://datasheet.ciiva.com/16858/pyu-rc0402-51-rohs-l-6-16858393.pdf?src-supplier=Avnet+Europe, Composition="Thick Film", Contact Plating=Tin,Matte, Depth=0.5mm, Features="Moisture Resistant", Height=0.016inch, Lead Free="Lead Free", Length=1mm, Military Standard=Not, Number of Terminations=2, Packaging="Tape and Reel", Power Rating=63mW, Pricing 1="1=0.10000, 10=0.01600, 100=0.00640, 1000=0.00289, 2500=0.00251, 5000=0.00207 (USD)", REACH SVHC=Unknown, RoHS=Yes, Stock 1=365336, Supplier 1=Digi-Key, Termination=SMD/SMT, Voltage Rating (DC)=50V, Width=0.02inch